# EAGLE board untitled (EAGLE 7.2.0)
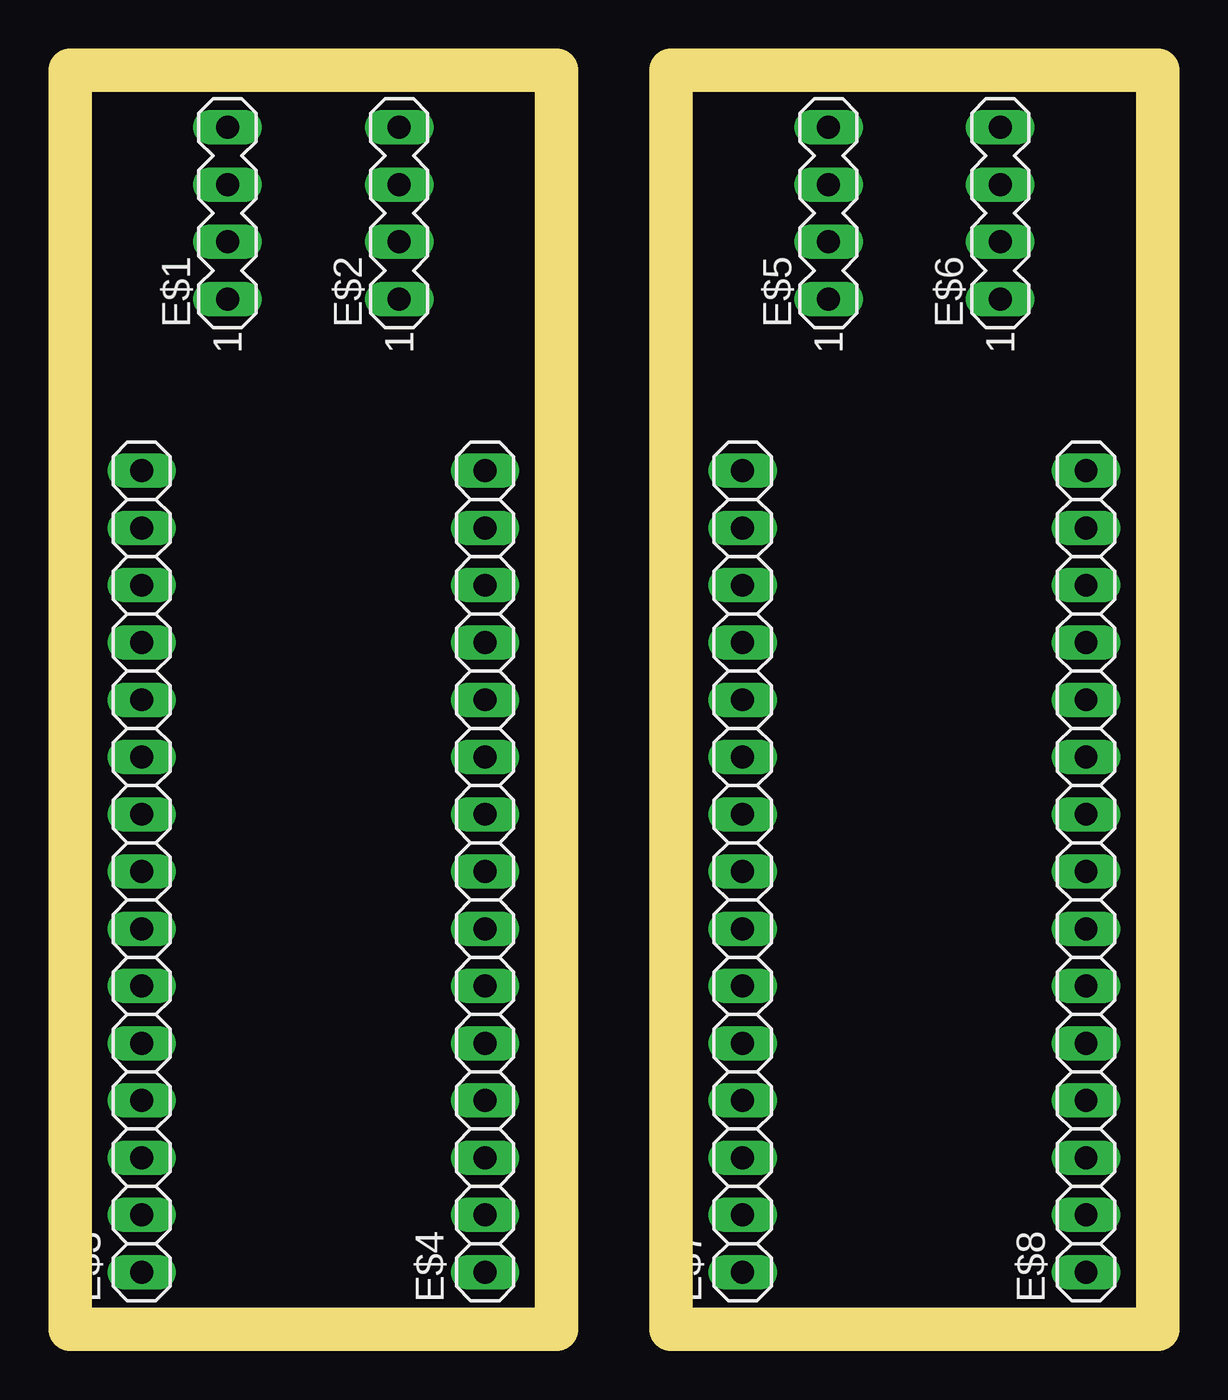
[diagram p0: board, top side]
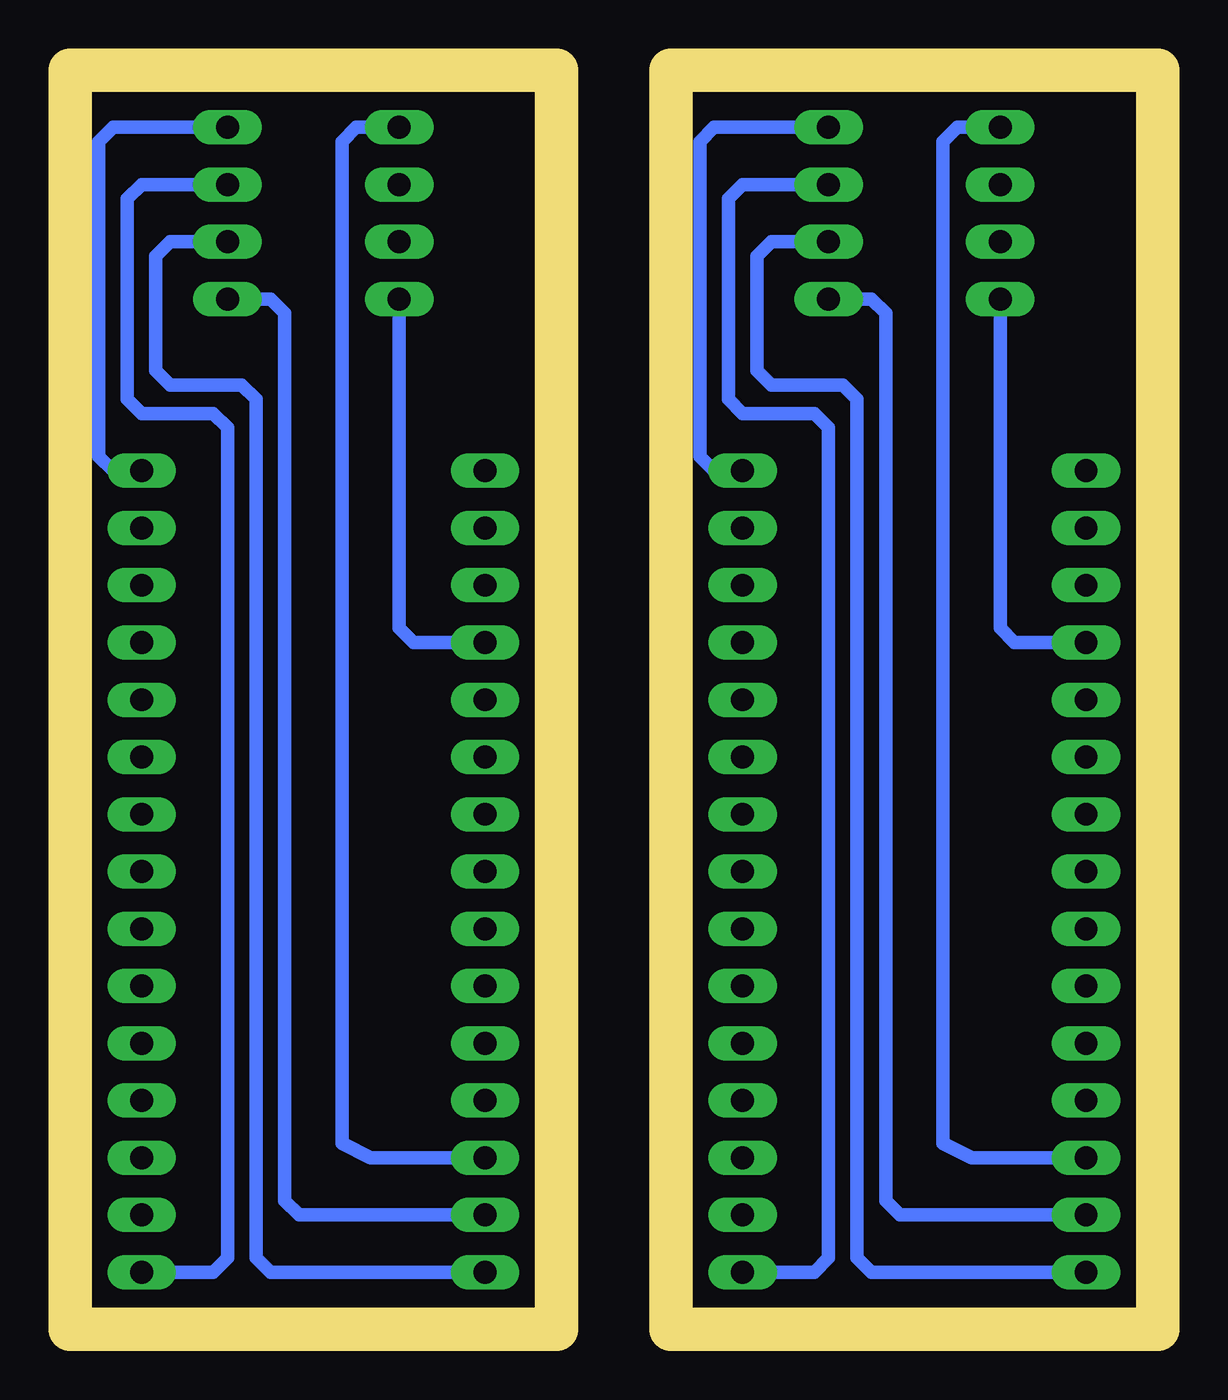
[diagram p1: board, bottom side, seen from below]

No outline drawn. Coordinates in mm, seen from the top.
Copper layers (1*16): Top 0.035mm / dielectric 1.5mm / Bottom 0.035mm
Design rules "default": minimum track width 10mil, minimum drill 24mil, track to track 8mil, track to pad 8mil, pad to pad 8mil, via to via 8mil, smd to smd 8mil, copper to edge 40mil, drill to drill 8mil, minimum pad ring 10mil, minimum via ring 8mil, stop-mask expansion 4mil, vias tented up to drill 0mil, thermal gap 10mil
Milling: 8 lines

## Footprints (pad centres in the part's own frame; a part is rotated, then mirrored left to right if it is on the bottom)
MA04-1 = drill 1.016 long: 1 -3.81,0; 2 -1.27,0; 3 1.27,0; 4 3.81,0
1X15 = drill 1.016 long: 1 -17.78,0; 2 -15.24,0; 3 -12.7,0; 4 -10.16,0; 5 -7.62,0; 6 -5.08,0; 7 -2.54,0; 8 0,0; 9 2.54,0; 10 5.08,0; 11 7.62,0; 12 10.16,0; 13 12.7,0; 14 15.24,0; 15 17.78,0

## Placement (x,y rotation side)
E$1  [MA04-1]  -43.18,50.8 90 top
E$2  [MA04-1]  -35.56,50.8 90 top
E$3  [1X15]  -46.99,21.59 90 top
E$4  [1X15]  -31.75,21.59 90 top
E$5  [MA04-1]  -16.51,50.8 90 top
E$6  [MA04-1]  -8.89,50.8 90 top
E$7  [1X15]  -20.32,21.59 90 top
E$8  [1X15]  -5.08,21.59 90 top

## Library data of the parts
E$1 E$2 E$5 E$6 = con-lstb
E$3 E$4 E$7 E$8 = pinhead

## Nets
S$1: E$3.12
S$2: E$4.15
S$3: E$3.3
S$4: E$3.2
S$5: E$3.1
S$6: E$4.1
S$7: E$7.12
S$8: E$8.15
S$9: E$7.3
S$10: E$7.2
S$11: E$7.1
S$12: E$8.1

## Tracks (layer width: path | path; a pad name or v marks a point on that pad's centre or on a via)
S$1
  Bottom 0.61: -43.18,46.99 -43.18,32.38 -43.81,31.75 E$3.12
S$2
  Bottom 0.61: -34.29,54.61 -30.48,54.61 -29.84,53.98 -29.84,40.01 -30.48,39.37 E$4.15
S$3
  Bottom 0.61: -43.18,54.61 -41.27,54.61 -40.64,53.98 -40.64,9.53 -41.91,8.89 E$3.3
S$4
  Bottom 0.61: -35.56,46.99 -37.47,46.99 -38.1,46.35 -38.1,6.99 -38.73,6.35 E$3.2
S$5
  Bottom 0.61: E$3.1 -37.47,3.81 -36.83,4.45 -36.83,42.55 -36.2,43.18 -33.02,43.18 -32.38,43.81 -32.38,48.9 -33.02,49.53 -34.29,49.53
S$6
  Bottom 0.61: E$4.1 -34.92,3.81 -35.56,4.45 -35.56,41.27 -34.92,41.91 -31.75,41.91 -31.11,42.55 -31.11,51.44 -31.75,52.07 -35.56,52.07
S$7
  Bottom 0.61: -16.51,46.99 -16.51,32.38 -17.14,31.75 E$7.12
S$8
  Bottom 0.61: -7.62,54.61 -3.81,54.61 -3.17,53.98 -3.17,40.01 -3.81,39.37 E$8.15
S$9
  Bottom 0.61: -16.51,54.61 -14.61,54.61 -13.97,53.98 -13.97,9.53 -15.24,8.89 E$7.3
S$10
  Bottom 0.61: -8.89,46.99 -10.79,46.99 -11.43,46.35 -11.43,6.99 -12.06,6.35 E$7.2
S$11
  Bottom 0.61: E$7.1 -10.79,3.81 -10.16,4.45 -10.16,42.55 -9.53,43.18 -6.35,43.18 -5.71,43.81 -5.71,48.9 -6.35,49.53 -7.62,49.53
S$12
  Bottom 0.61: E$8.1 -8.26,3.81 -8.89,4.45 -8.89,41.27 -8.26,41.91 -5.08,41.91 -4.45,42.55 -4.45,51.44 -5.08,52.07 -8.89,52.07
S$13
  Bottom 0.61: -50.16,57.15 -28.83,57.15 -28.57,56.9 -28.57,1.27 -49.91,1.27 -50.16,1.52 -50.16,57.15
S$14
  Bottom 0.61: -23.5,57.15 -23.5,1.27 -1.91,1.27 -1.91,57.15 -23.5,57.15